# Altium PCB PCB1.PcbDoc
Units mm, origin at the board's own origin, x right, y up, seen from the top; angles counter-clockwise.
Board outline 152.4 x 101.6 mm, 2 copper layers (Top Layer, Bottom Layer); 23 components, 12 nets, 53 pads, 0 vias.
Unrouted connection lines stored in the file: 1.
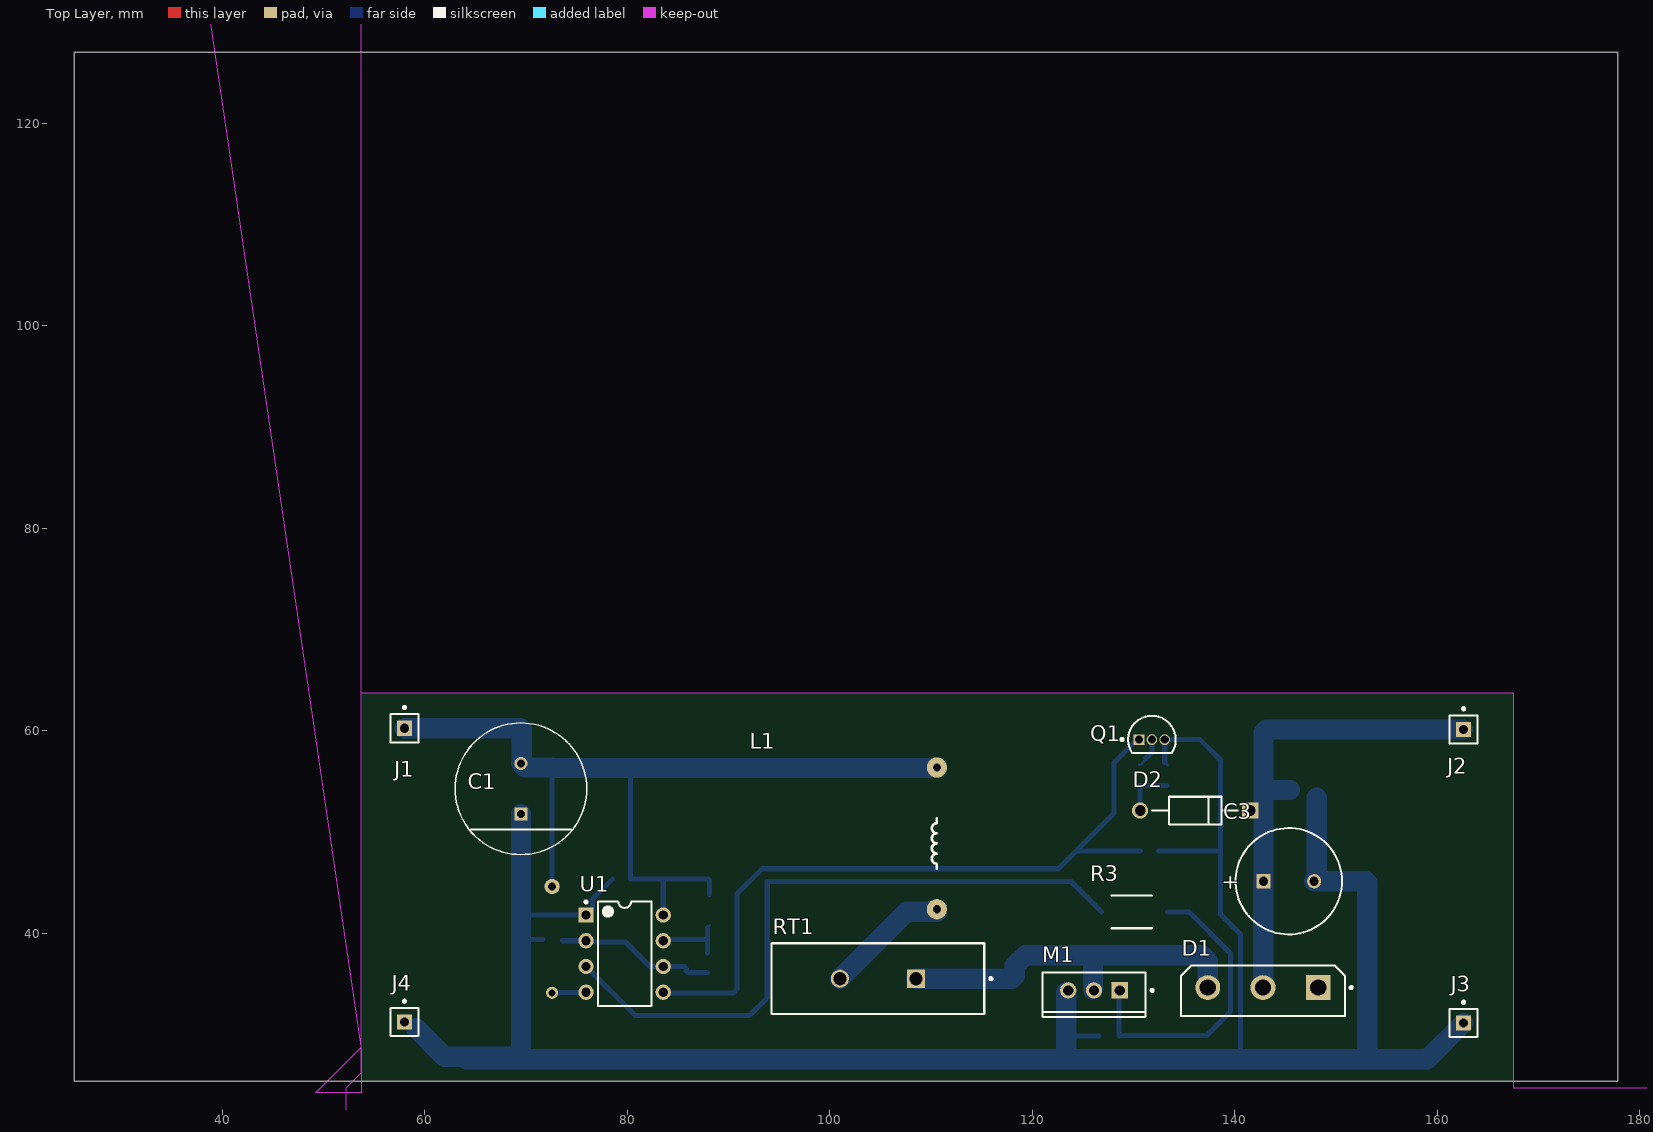
[diagram p0: Top Layer view]
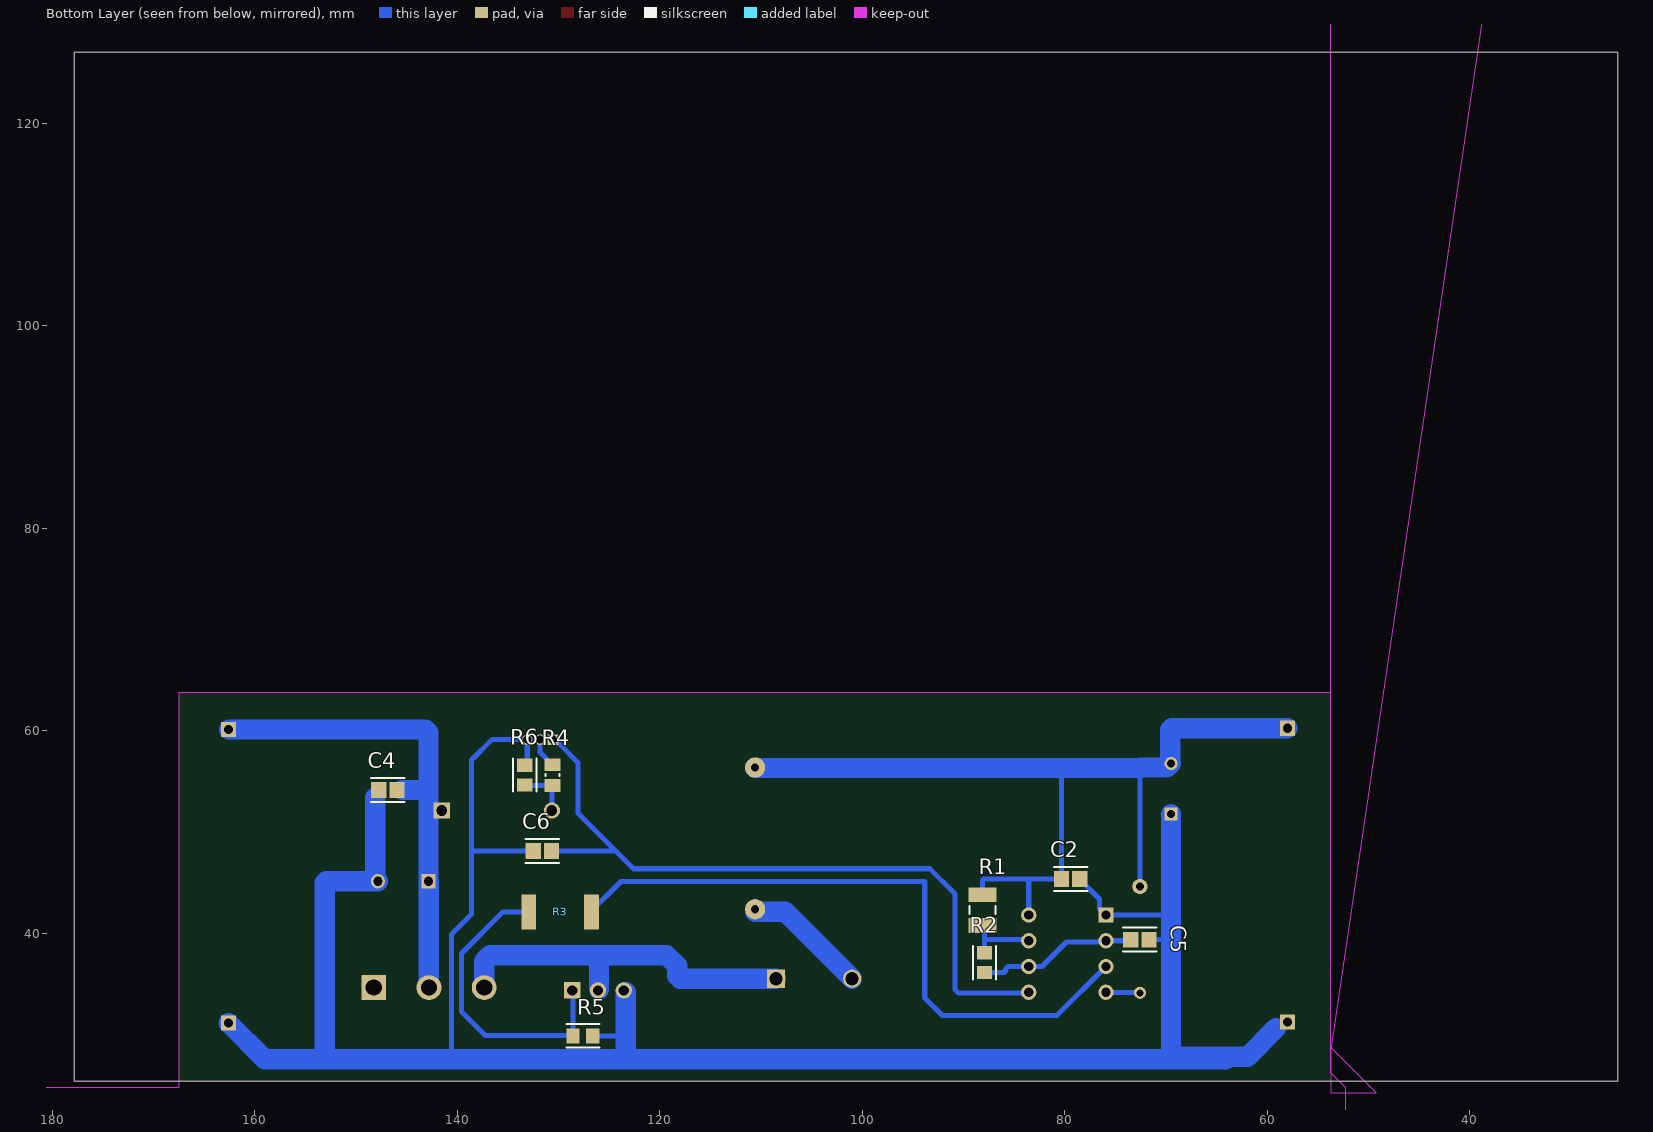
[diagram p1: Bottom Layer view, seen from below]
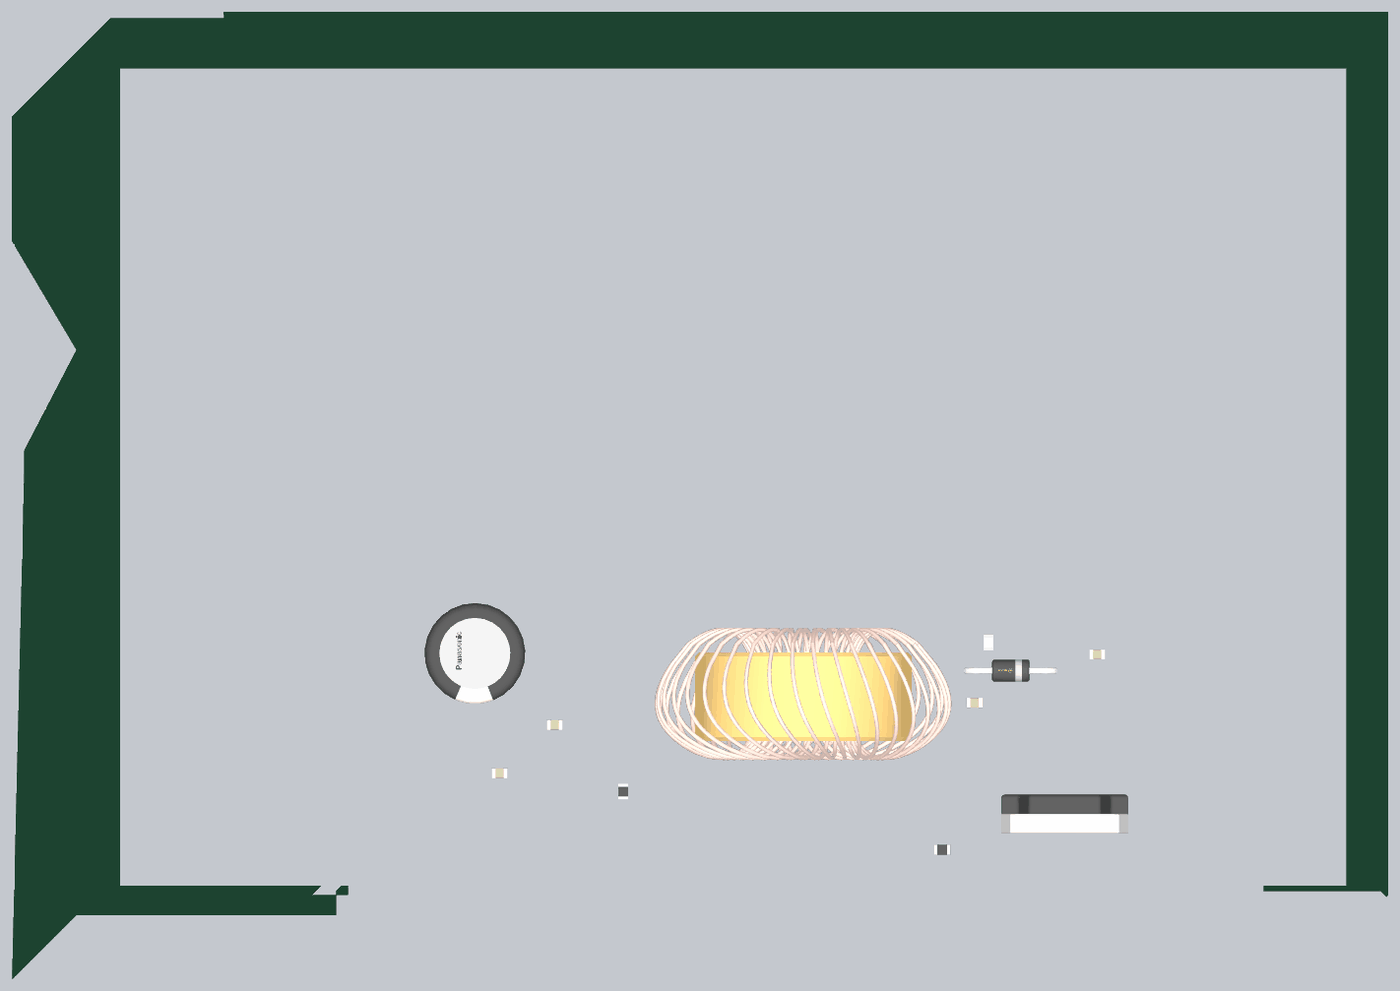
[diagram p2: 3D render of the assembled board from above, using the file's embedded part models]
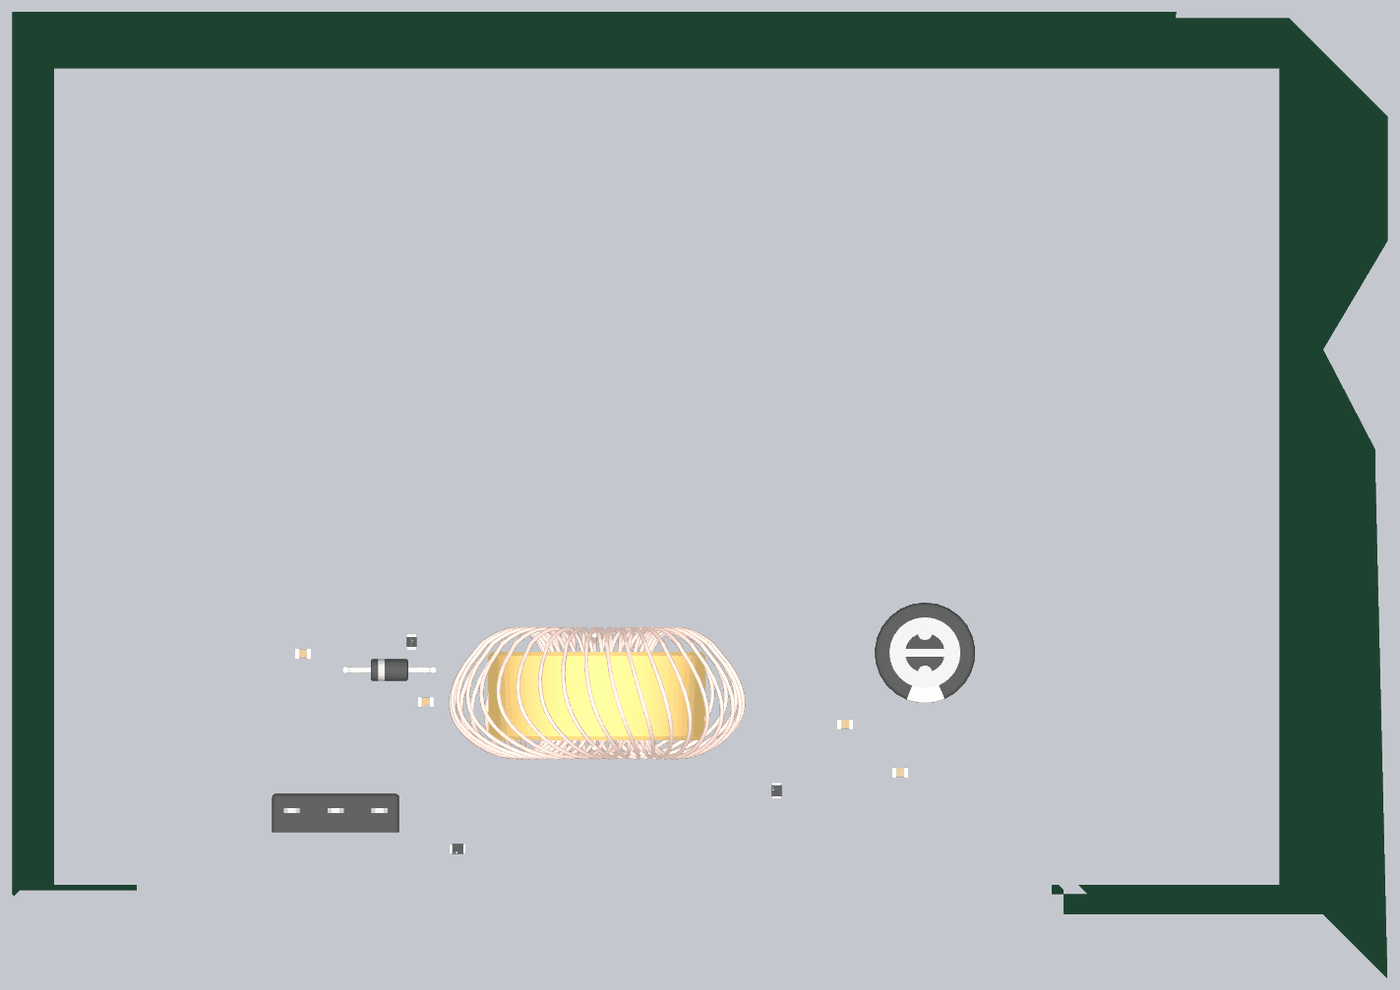
[diagram p3: 3D render of the assembled board from below, using the file's embedded part models]

## Layer stack, top to bottom
Top Solder: solder mask 0.0102, Solder Resist, Dk 3.5
Top Layer: signal copper 0.0356
Dielectric 1: dielectric 0.32, FR-4, Dk 4.8
Bottom Layer: signal copper 0.0356
Bottom Solder: solder mask 0.0102, Solder Resist, Dk 3.5

## Board outline
25.4,25.4 177.8,25.4 177.8,127 25.4,127
cut-out: 53.75,28.5 53.75,24.25 49.25,24.25 53.75,28.75 53.75,63.75 167.5,63.75 167.5,24.75 182,24.75 182.75,24 183,24.25 183,134 38.25,134
cut-out: 12,13.75 20,21.75 52.25,21.75 52.25,24.75 53.75,26.25 53.75,133.25 24.25,133.25 12,121 12,105.5 20,92 13.5,79.5 13.5,76.75

## Design rules (kind name [scope] priority, off if disabled: settings)
Clearance [All] p1: gap=0.254 ignorepadtopadclearanceinfootprint=FALSE except(0: Arc-Hole Track-Hole SMDPad-Hole THPad-Hole Via-Hole Fill-Hole Poly-Hole Region-Hole Text-Hole)
PolygonConnect [All] p1: connectstyle=Relief reliefconductorwidth=0.254 reliefentries=4 polygonreliefangle="90 Angle" airgapwidth=0.254
RoomDefinition Sheet1 [InComponentClass('Sheet1')] p1: confinementstyle=ConfineIn formatcopy=TRUE lockcomponents=FALSE outline 54.075,26.63 166.825,26.63 166.825,62.88 54.075,62.88
RoutingVias [All] p1: holewidth=0.711 width=1.27 viastyle="Through Hole" minholewidth=0.711 minwidth=1.27 maxholewidth=0.711 maxwidth=1.27
SolderMaskExpansion [All] p1: expansion=0.102 istentingtop=FALSE
Width [All] p1: maxlimit=0.254 minlimit=0.254 preferedwidth=0.254
30 further rules are at their usual default settings.

## Classes and differential pairs
component class Sheet1: C1 C4 C5 D1 D2 J1 J2 J3 J4 L1 M1 Q1 R1 R2 R4 R5 R6 R?1 RT1 U1

## Components (designator, comment, footprint, x,y, rotation, side; value= is the part's Value field where it differs from the comment)
C1 "MALREKA00FG447DG0K" FP-ECA-1HM102-MFG 69.5,54.275 r90 top
C2 "C0805C104K3RACAUTO" FP-C0805C-DN-IPC_A 79.424,45.38 r0 bottom value="0.10 μF"
C3 "16ZLQ2200MEFC10X25" PNSC-EEUFM1H221-2 145.325,45.15 r0 top
C4 "C0805C104K3RACAUTO" FP-C0805C-DN-IPC_A 146.825,54.15 r0 bottom value="0.10 μF"
C5 "C0805C102K5RACAUTO" FP-C0805C-DN-IPC_A 72.575,39.38 r180 bottom value="1 pF"
C6 "C0805C104K3RACAUTO" FP-C0805C-DN-IPC_A 131.575,48.13 r0 bottom value="0.10 μF"
D1 "MBR4060PT" FP-340BZ-MFG 142.775,34.325 r270 top
D2 "BZX85C12" FP-017AH-MFG 136.075,52.13 r180 top
J1 "Socket" PIN1 58,60.25 r0 top
J2 "Socket" PIN1 162.575,60.13 r0 top
J3 "Socket" PIN1 162.575,31.15 r0 top
J4 "Socket" PIN1 58,31.25 r0 top
L1 "Inductor" Inductor 110.575,48.88 r90 top value=200uH
M1 "IRFZ44N" INF-PG-TO220-3-1 126.085,34.375 r270 top
Q1 "BC547B" ONSC-TO-92-3-29-11 131.805,59.13 r0 top
R1 "ERJ-P14J362U" RESC3225X70X50ML20T20 88.125,42.3 r90 bottom
R2 "RN73C2A10KBTG" FP-RN732A-IPC_A 87.925,37.1 r90 bottom value=10KΩ
R3 "51R 1% 2512(6432)" RESC2512(6432)_M 129.825,42.13 r0 top value="51.00 Ohm"
R4 "RK73H2ATTE1001F" RESC2013X60X30ML20T20 130.575,55.63 r90 bottom
R5 "RN73C2A10KBTG" FP-RN732A-IPC_A 127.575,29.875 r0 bottom value=10KΩ
R6 "CRGP0805F47K" FP-CRGP0805-IPC_A 133.325,55.63 r270 bottom value=47KΩ
RT1 "B57364S209M" TDK-B57364 104.75,35.525 r180 top
U1 "LM555CN" N08E 79.745,38 r0 top

## Footprints (in the part's own frame and the unit in brackets; to place one, negate y for a bottom-side part, rotate by r counter-clockwise, add the part's x,y. Pads: shape width x height; smd on the part's side, far side on the other; paste and mask are expansions set on the pad)
FP-017AH-MFG [mm]
  rect 1.6x1.6 hole 1.05 paste-1000 mask+0: 1(-5.438,0)
  round 1.6 hole 1.05 paste-1000 mask+0: 2(5.438,0)
  silkscreen extent -4.24,-1.36 4.24,1.36, body extent -6.34,-1.46 6.34,1.46, height 0.25
FP-340BZ-MFG [mm]
  rect 2.45x2.45 hole 1.6 paste-1000 mask+0: 1(-0.325,5.45)
  round 2.45 hole 1.6 paste-1000 mask+0: 2(-0.325,0) 3(-0.325,-5.45)
  silkscreen extent -2.5,-8.1 2.5,8.83, body extent -2.6,-8.2 2.6,8.2, height 0.25
FP-C0805C-DN-IPC_A [mm]
  rect 1.505x1.556 smd paste+0 mask+0: 1(-0.901,0) 2(0.901,0)
  silkscreen extent -1.65,-1.18 1.65,1.18, body extent -1,-0.63 1,0.63, height 0.88
FP-CRGP0805-IPC_A [mm]
  rect 1.306x1.51 smd paste+0 mask+0: 1(-0.976,0) 2(0.976,0)
  silkscreen extent -1.63,-1.15 1.63,1.15, body extent -1,-0.63 1,0.63, height 0.65
FP-ECA-1HM102-MFG [mm]
  rect 1.3x1.3 hole 0.8 paste-1000 mask+0: 1(-2.5,0)
  round 1.3 hole 0.8 paste-1000 mask+0: 2(2.5,0)
  silkscreen extent -6.5,-6.5 6.5,6.5, body extent -6.6,-6.6 6.6,6.6, height 0.25
FP-RN732A-IPC_A [mm]
  rect 1.306x1.508 smd paste+0 mask+0: 1(-0.976,0) 2(0.976,0)
  silkscreen extent -1.63,-1.15 1.63,1.15, body extent -1,-0.63 1,0.63, height 0.65
Inductor [mm] "Inductor"
  round 2 hole 0.8: 1(-6.5,0) 2(7.5,0)
  silkscreen extent -2.5,0 2.5,0.5, body extent -7.85,-18.13 8.6,18.73, height 37.43
INF-PG-TO220-3-1 [mm] "FM, 3-Leads, Body 10x4.4mm, Pitch 2.54mm"
  rect 1.6x1.6 hole 1: 1(0,2.54)
  round 1.6 hole 1: 2(0,0) 3(0,-2.54)
  silkscreen extent -1.75,-5.1 2.65,5.88, body extent -1.75,-5.1 2.65,5.1, height 20.7
N08E [mm] "DIP, 8-Pin, Row Spacing 7.62 mm, Pitch 2.54 mm"
  rect 1.5x1.5 hole 0.9: 1(-3.81,3.81)
  round 1.5 hole 0.9: 2(-3.81,1.27) 3(-3.81,-1.27) 4(-3.81,-3.81) 5(3.81,-3.81) 6(3.81,-1.27) 7(3.81,1.27) 8(3.81,3.81)
  silkscreen extent -3.93,-5.15 2.65,5.23, body extent -3.6,-5.15 3.6,5.15, height 5.33
ONSC-TO-92-3-29-11 [mm] "TO, 3-Leads, Body Dia 4.7mm, Pitch 1.27mm"
  rect 1.05x1.05 hole 0.8: 1(-1.27,0)
  round 1.05 hole 0.8: 2(0,0) 3(1.27,0)
  silkscreen extent -3.07,-1.34 2.35,2.35, body extent -2.35,-1.33 2.36,2.36, height 7.87
PIN1 [mm] "Connector; Plug"
  rect 1.5x1.5 hole 0.9: 1(0,0)
  silkscreen extent -1.4,-1.4 1.4,2.17
PNSC-EEUFM1H221-2 [mm] "THD, 2-Leads, Dia 10.5mm, Body Length 17.5mm, Pin Spacing 5mm"
  rect 1.4x1.4 hole 0.9: 1(-2.5,0)
  round 1.4 hole 0.9: 2(2.5,0)
  silkscreen extent -5.25,-5.25 5.25,5.25, body extent -5.25,-5.25 5.25,5.25, height 17.5
RESC2013X60X30ML20T20 [mm] "Chip Resistor, 2-Leads, Body 2.00x1.25mm, IPC Low Density"
  rect 1.25x1.55 smd: 1(-1.025,0) 2(1.025,0)
  silkscreen extent -0.1,-0.67 0.1,0.67, body extent -1.1,-0.72 1.1,0.72, height 0.6
RESC2512(6432)_M [mm] "Chip Resistor, Body 6.4x3.2mm, IPC Low Density"
  rect 1.45x3.45 smd far side: 1(-3.1,0) 2(3.1,0)
  silkscreen extent -2,-1.63 2,1.63, body extent -3.25,-1.7 3.25,1.7, height 0.75
RESC3225X70X50ML20T20 [mm] "Chip Resistor, 2-Leads, Body 3.20x2.50mm, IPC Low Density"
  rect 1.45x2.8 smd: 1(-1.525,0) 2(1.525,0)
  silkscreen extent -0.4,-1.3 0.4,1.3, body extent -1.7,-1.35 1.7,1.35, height 0.7
TDK-B57364 [mm] "THD, 2-Leads, Body 21x7mm"
  rect 1.8x1.8 hole 1.3: 1(-3.75,0)
  round 1.8 hole 1.3: 2(3.75,0)
  silkscreen extent -11.28,-3.5 10.5,3.5, body extent -10.5,-3.5 10.5,3.5, height 28

## Part data
C1: "Cap Alum 4700UF 20% 16V Radial", Capacitance=4.7mF, Case/Package=Radial, ESR (Equivalent Series Resistance)=80mR, Manufacturer="Vishay Roederstein", Max Operating Temperature=85°C, Min Operating Temperature=-40°C, Package Quantity=400, Ripple Current=2.129A, Tolerance=20%, Voltage Rating=16V, Category="Aluminum Electrolytic Capacitors", ComponentLink1Description=http://www.vishay.com/docs/25001/alucapsintroduction.pdf?src-supplier=Digi-Key, ComponentLink1URL=http://www.vishay.com/docs/25001/alucapsintroduction.pdf?src-supplier=Digi-Key, Height - Seated (Max)=1.063inch, Lead Pitch=0.197inch, Life (Hours)=2000Hour, Manufacturer Part Number=MALREKA00FG447DG0K, Mount="Through Hole", Packaging=Bulk, Polarity=Polar, Pricing 1="2000=0,67103, 2800=0,65462, 4800=0,64540, 10000=0,62696, 20000=0,61313, 100000=0,59930, 200000=0,58547 (USD)", RoHS=Yes, RoHS Compliant=Yes, Supplier 1=Avnet, Supplier Part Number 1=MALREKA00FG447DG0K
C2 C4 C6: library part CMP-2007-01164-2, "CAP CER 0.1UF 25V X7R 0805", Capacitance="0.10 μF", Manufacturer=KEMET, Package=C0805C-DN, Temperature="-55°C to +125°C", Temperature Characteristic=X7R, Temperature Coefficient=30ppm/°C, Temperature Range High=+125°C, Temperature Range Low=-55°C, Tolerance=0.1, Voltage Rating="25 V", Automotive=No, Category=Cap, ComponentLink2Description=Datasheet, ComponentLink2URL=https://content.kemet.com/datasheets/KEM_C1003_C0G_SMD.pdf, Device Class L1="Passive Components", Device Class L2=Capacitors, Device Class L3="Ceramic Capacitors", Digikey Description="CAP CER 0.1UF 25V X7R 0805", Height=0.88mm, Ipc Land Pattern Name=CAPC200125X78, Lead Free=Yes, Manufacturer Part Number=C0805C104K3RACAUTO, Material=Ceramic, Mouser Description="Smd Multilayer Ceramic Capacitor, Aec-Q200 C Series, 0.1 F, 10%, X7r, 25 V, 0805 [2012 Metric]", Octopart=https://octopart.com/c0805c104k3racauto-kemet-12542886, RoHS=TRUE
C3: "Cap Aluminum Lytic 2200uF 16V 20% (10 X 25mm) Radial 5mm 2500mA 5000h 105C", Capacitance=2.2mF, Case/Package=Radial, Manufacturer=Rubycon, Max Operating Temperature=105°C, Min Operating Temperature=-40°C, Ripple Current=1.75A, Tolerance=20%, Voltage Rating=16V, Category="Aluminum Electrolytic Capacitors", ComponentLink1Description=http://www.rubycon.co.jp/en/catalog/e_pdfs/aluminum/e_ZLQ.pdf?src-supplier=Digi-Key, ComponentLink1URL=http://www.rubycon.co.jp/en/catalog/e_pdfs/aluminum/e_ZLQ.pdf?src-supplier=Digi-Key, Height - Seated (Max)=1.063inch, Impedance=15mR, Lead Pitch=0.197inch, Life (Hours)=5000Hour, Manufacturer Part Number=16ZLQ2200MEFC10X25, Mount="Through Hole", Packaging=Bulk, Polarity=Polar, Pricing 1="1=0,98000, 10=0,72100, 50=0,57700, 100=0,49460, 500=0,39156, 1000=0,32973, 2500=0,30912, 5000=0,28851 (USD)", RoHS=Yes, Stock 1=488, Supplier 1=Digi-Key
C5: library part CMP-2007-00243-2, "1 pF ±0.25pF 200V Ceramic Capacitor C0G, NP0 0805R 0805", Capacitance=1pF, Manufacturer=KEMET, Package=C0805C-DN, Temperature="-55°C to +125°C", Temperature Characteristic=X7R, Temperature Coefficient=30ppm/°C, Temperature Range High=+125°C, Temperature Range Low=-55°C, Tolerance=0.1, Voltage Rating="200 V", Automotive=No, Category=Cap, ComponentLink2Description=Datasheet, ComponentLink2URL=https://content.kemet.com/datasheets/KEM_C1003_C0G_SMD.pdf, Device Class L1="Passive Components", Device Class L2=Capacitors, Device Class L3="Ceramic Capacitors", Digikey Description="1 pF ±0.25pF 200V Ceramic Capacitor C0G, NP0 0805 (2012 Metric)", Height=0.88mm, Ipc Land Pattern Name=CAPC200125X78, Lead Free=Yes, Manufacturer Part Number=C0805C102K5RACAUTO, Material=Ceramic, Mouser Description="Cap Ceramic 0.001uF 50V X7R 10% Pad SMD 0805 125C Automotive T/R", Octopart=https://octopart.com/c0805c102k5racauto-kemet-12563740, RoHS=TRUE
D1: "Schottky Diodes & Rectifiers 43 amp Rectifiers Schottky Barrier", Average Rectified Current=40A, Case/Package=TO-247, Forward Voltage=720mV, Manufacturer="ON Semiconductor / Fairchild", Max Forward Surge Current (Ifsm)=400A, Max Operating Temperature=150°C, Max Repetitive Reverse Voltage (Vrrm)=60V, Max Reverse Current=100mA, Max Reverse Leakage Current=1mA, Min Operating Temperature=-65°C, Package Quantity=30, Category="Schottky Diodes", ComponentLink1Description=https://datasheet.ciiva.com/4714/mbr4060pt-195686-4714526.pdf?src-supplier=Mouser, ComponentLink1URL=https://datasheet.ciiva.com/4714/mbr4060pt-195686-4714526.pdf?src-supplier=Mouser, ComponentLink2Description=https://datasheet.ciiva.com/17322/mbr4060pt-17322588.pdf?src-supplier=Future+Electronics, ComponentLink2URL=https://datasheet.ciiva.com/17322/mbr4060pt-17322588.pdf?src-supplier=Future+Electronics, ComponentLink3Description=https://datasheet.ciiva.com/8300/mbr4060pt-8300748.pdf?src-supplier=Avnet, ComponentLink3URL=https://datasheet.ciiva.com/8300/mbr4060pt-8300748.pdf?src-supplier=Avnet, Current Rating=40A, Element Configuration="Common Cathode", Forward Current=40A, Height=21.3mm, Lead Free="Lead Free", Length=16.4mm, Manufacturer Part Number=MBR4060PT, Max Reverse Voltage (DC)=60V, Max Surge Current=400A, Mount="Through Hole", Number of Pins=3, Packaging=Rail/Tube, Peak Non-Repetitive Surge Current=400A, Pricing 1="1=2,70350, 10=1,95840, 100=1,82790, 250=1,49630, 500=1,48140, 1000=1,41390 (USD)", Radiation Hardening=No, RoHS=Yes, RoHS Compliant=Yes, Stock 1=226, Supplier 1="Arrow Electronics", Supplier Part Number 1=MBR4060PT, Voltage Rating (DC)=60V, Weight=5.508g, Width=5.22mm
D2: library part CMP-07164-000008-1, "DIODE ZENER 12V 1W DO41", Forward Current=200mA, Manufacturer="ON Semiconductor", Max Junction Temp=+200°C, Max Reverse Leakage Current=0.5uA, Max Zener Voltage=12.7V, Nom Zener Voltage=12V, Package=017AH, Power Dissipation=1W, Reverse Voltage=8.4V, Temperature="-65°C to +200°C", Temperature Range Low=-65°C, Automotive=No, Category=Diode, ComponentLink2Description=Datasheet, ComponentLink2URL=https://www.onsemi.com/pub/Collateral/BZX85C3V3-D.PDF, Device Class L1="Discrete Semiconductors", Device Class L2=Diodes, Device Class L3="Zener Diodes", Digikey Description="DIODE ZENER 12V 1W DO41", Footprint Url=https://www.onsemi.com/pub/Collateral/017AH.PDF, Height=2.72mm, Ipc Land Pattern Name=DIOPA1088W105L520D272, Lead Free=Yes, Manufacturer Part Number=BZX85C12, Mouser Description="Zener Diodes 12V 1W Zener", Octopart=https://octopart.com/bzx85c12-on+semiconductor-84409056, RoHS=TRUE, Temperature Range High=+200°C, Zener Impedance=9Ω
M1: "MOSFET, Power; N-Ch; VDSS 55V; RDS(ON) 17.5 Milliohms; ID 49A; TO-220AB; PD 94W; -55deg", Case/Package=TO-220AB, Continuous Drain Current (ID)=49A, Gate to Source Voltage (Vgs)=20V, Manufacturer="International Rectifier", Max Operating Temperature=175°C, Min Operating Temperature=-55°C, Power Dissipation=94W, Supplier Part Number 1=IRFZ44NPBF-ND, Category=MOSFETs, ComponentLink1Description=http://components.arrow.com/part/dataview/0323_01885316?src-supplier=Arrow+Europe, ComponentLink1URL=http://components.arrow.com/part/dataview/0323_01885316?src-supplier=Arrow+Europe, Fall Time=165ns, Manufacturer Part Number=IRFZ44N, Mount="Through Hole", Number of Elements=1, Number of Pins=3, Pricing 1="1=1,25000, 10=1,12000, 25=1,06280, 100=0,87290, 500=0,72108, 1000=0,57752 (USD)", Rise Time=185ns, RoHS=No, Stock 1=16256, Supplier 1=Digi-Key, Turn-Off Delay Time=85ns, Turn-On Delay Time=19ns
Q1: library part CMP-1048-01467-1, "Amplifier Transistor, NPN Silicon, 3-Pin TO-92, Bulk Box", Manufacturer="On Semiconductor", ComponentLink1Description="Manufacturer URL", ComponentLink1URL=http://www.onsemi.com/, ComponentLink2Description=Datasheet, ComponentLink2URL=http://www.onsemi.com/pub_link/Collateral/BC546-D.PDF, ComponentLink3Description="Package Specification", ComponentLink3URL=http://www.onsemi.cn/pub_link/Collateral/2N6426-D.PDF, DatasheetVersion="Rev. 7", fT Min (MHz)=150, IC Continuous (A)=0.1, Mounting Technology="Through Hole", PackageDescription="3-Pin Transistor Outline, Body 4.825 x 3.685 mm, Pitch 1.27 mm", PackageReference=TO-92-3-29-11_AM_SL, PackageVersion="Rev. AM", Packing="Bulk Box", PartNumber=BC547B, Polarity=NPN, RoHS=FALSE
R1: library part CMP-2005-03719-1, Manufacturer=Panasonic, Part Number=ERJ-P14J362U
R2 R5: library part CMP-03211-001029-1, "SMD Chip Resistor, Thin Film, 10KΩ, 100 V, 0805 [2012 Metric], 100 mW, 0.1%, RN73 Series", Manufacturer="TE Connectivity", Package=RN732A, Power Rating=0.1W, Resistance=10KΩ, Temperature="-55°C to 155°C", Temperature Coefficient=10ppm/°C, Temperature Range High=155°C, Temperature Range Low=-55°C, Tolerance=0.1%, Voltage Rating=100V, Automotive=No, Category=Res, ComponentLink2Description=Datasheet, ComponentLink2URL=https://www.te.com/commerce/DocumentDelivery/DDEController?Action=showdoc&DocId=Data+Sheet%7F1773270%7FP%7Fpdf%7FEnglish%7FENG_DS_1773270_P.pdf%7F1676162-2, Composition="Thin Film", Device Class L1="Passive Components", Device Class L2=Resistors, Device Class L3="Chip SMD Resistors", Height=0.65mm, Ipc Land Pattern Name=RESC200125X55, Lead Free=Yes, Manufacturer Part Number=RN73C2A10KBTG, Octopart=https://octopart.com/rn73c2a10kbtg-te+connectivity-21411919, octopart_url=https://octopart.com/rn73c2a10kbtg-te+connectivity-21411919, Packaging="250 cut tape length", RoHS=TRUE, Series=RN73
R3: library part CMP-1018-00364-1, "51R 1W 1% 2512 (6432 Metric)  SMD", Case-EIA=2512, Case-Metric=6432, Power="1 W", Tolerance="1 %", Technology=SMT
R4: library part CMP-2001-01881-1, Manufacturer="KOA Speer", Part Number=RK73H2ATTE1001F
R6: library part CMP-03211-006358-1, "CRGP0805 47KΩ 0.33W ±100ppm/°C 1% 150V", Ambient Temperature Range High=+70°C, Manufacturer=TE, Package=CRGP0805, Power Rating=0.33W, Resistance=47KΩ, Temperature="-55°C to +155°C", Temperature Coefficient=±100ppm/°C, Temperature Range High=+155°C, Temperature Range Low=-55°C, Tolerance=0.01, Voltage Rating=150V, Automotive=No, Category=Res, ComponentLink2Description=Datasheet, ComponentLink2URL=https://www.mouser.com/datasheet/2/418/NG_DS_9-1773463-9_A-1358566.pdf, Composition="Thick Film", Device Class L1="Passive Components", Device Class L2=Resistors, Device Class L3="Chip SMD Resistors", Height=0.65mm, Ipc Land Pattern Name=RESC200125X55, Lead Free=Yes, Manufacturer Part Number=CRGP0805F47K, Octopart=https://octopart.com/crgp0805f47k-te+connectivity-91018823, RoHS=TRUE, Series=CRGP
RT1: library part CMP-2000-05907-1, "Inrush Current Limiter, 2 Ohm, -55 to 170 degC, 2-Pin THD, RoHS, Bulk", Manufacturer=TDK, Package Description="2-Pin Through Hole Device, Body 21 x 7 mm", Package Reference=B57364, Datasheet URL=https://en.tdk.eu/inf/50/db/icl_16/S364.pdf, Datasheet Version=11/2015, Manufacturer URL=http://www.tdk.com/, Mounting Technology=ThroughHole
U1: library part CMP-0056-00017-2, "Timer, 8-pin MDIP", Manufacturer="National Semiconductor", PackageTopMarking=NSUZXYTTE#*LM*555CN, PowerWise=N, Code_JEDEC=MS-001-BA, ComponentLink1Description="LM555 Datasheet", ComponentLink1URL=http://www.national.com/ds/LM/LM555.pdf, ComponentLink2Description="LM555 Web Page", ComponentLink2URL=http://www.national.com/pf/LM/LM555.html, ComponentLink3Description="N08E Package Page", ComponentLink3URL=http://www.national.com/packaging/folders/n08e.html, CompType="Analog IC", DatasheetVersion=Jul-2006, PackageDescription="MDIP, .365 x .250 x .130in, 8 Lead, .100in Pitch", PackageReference=N08E, PackageVersion="revG, May-2006", PinCount=8, RevisionNote="Component URLs added", RoHS=N
J1 J2 J3 J4: LatestRevisionDate=17-Jul-2002, LatestRevisionNote="Re-released for DXP Platform.", Publisher="Altium Limited"

## Free pads (board coordinates)
  round 1.2 hole 0.7: 6(72.575,34.13)
  round 1.524 hole 0.762: 7(72.575,44.63)

## Nets (pads, with @x,y where several pads share a name; then routed paths per layer and width w, separated by ;. In a path a pad name is that pad's centre, name@x,y a point inside that pad or via, vN(x,y) a via of type N, cw(c..) or ccw(c..) an arc to the next point about the centre after c; other vN are vias at no path point)
GND: C1.1 C2.1 C3.2 C4.2 C5.2 C6.2 J3.1 J4.1 M1.3 Q1.3 R5.1 R6.1 U1.1 | length 236.9
  Bottom Layer w0.254: J4.1 J4.1@58.623,30.627 ; 69.5,27.9 69.575,27.825 ; 69.5,41.63 69.68,41.81 ; U1.1 U1.1@76.558,42.433 ; C2.1@78.523,45.354 C2.1 ; 123.35,29.85 123.375,29.875 ; M1.3@123.35,34.18 M1.3 ; R6.1@133.075,56.856 R6.1
  Bottom Layer w0.5: J4.1@58.623,30.627 59.148,30.627 ; 69.5,39.38 C5.2 ; 69.68,41.81 U1.1 ; U1.1@76.558,42.433 76.558,43.389 C2.1@78.523,45.354 ; 123.375,29.875 R5.1 ; C6.2 138.575,48.13 ; R6.1@133.075,56.856 Q1.3 136.575,59.13 138.575,57.13 138.575,48.13 ; 140.575,27.575 140.575,39.88 138.575,41.88 138.575,48.13 ; 152.926,45.15 153.075,45.001
  Bottom Layer w2: 59.148,30.627 61.95,27.825 69.575,27.825 ; 64.075,27.575 123.35,27.575 ; 69.5,27.9 69.5,39.38 69.5,41.63 C1.1 ; M1.3@123.35,34.18 123.35,29.85 123.35,27.575 ; C4.2@148.075,53.38 148.075,45.4 C3.2 152.926,45.15 ; 153.075,27.65 153.075,45.001 ; J3.1 159,27.575 140.575,27.575 123.35,27.575
NetC3_1: C3.1 C4.1 D1.2 D2.1 J2.1 | length 48.9
  Top Layer w0.254: C3.1@142.8,45.125 C3.1
  Bottom Layer w0.254: D2.1 142.825,52.13
  Bottom Layer w2: D1.2@142.8,34.65 C3.1@142.8,45.125 ; C3.1 142.825,52.13 142.825,54.15 ; C4.1@145.424,54.15 142.825,54.15 ; J2.1@162.492,60.13 143.118,60.13 142.825,59.837 142.825,54.15
NetC5_1: C5.1 R2.1 U1.2 U1.6 | length 15.9
  Bottom Layer w0.254: C5.1 C5.1@73.586,39.27 ; U1.2 U1.2@76.055,39.15 ; R2.1 R2.1@87.931,36.13
  Bottom Layer w0.5: C5.1@73.586,39.27 U1.2 ; U1.2@76.055,39.15 79.825,39.15 82.245,36.73 U1.6 85.597,36.73 85.825,36.501 85.825,36.273 85.974,36.124 R2.1
NetC6_1: C6.1 Q1.1 U1.5 | length 71.9
  Bottom Layer w0.254: U1.5 U1.5@83.615,34.13 ; 129.927,58.732 130.137,58.732 130.199,58.794 Q1.1@130.199,59.004
  Bottom Layer w0.5: U1.5@83.615,34.13 90.532,34.13 90.825,34.423 90.825,43.88 93.325,46.38 122.575,46.38 124.325,48.13 ; 129.927,58.732 128.075,56.88 128.075,51.88 124.325,48.13 ; C6.1 124.325,48.13
NetD1_3: D1.3 M1.2 RT1.1 | length 37.1
  Top Layer w0.254: RT1.1 RT1.1@108.55,35.475 ; M1.2@125.925,34.535 M1.2
  Bottom Layer w0.254: M1.2@126,34.46 M1.2 ; 136.75,37.85 136.758,37.842
  Bottom Layer w0.5: 117.975,35.525 118.275,35.825 ; 126,37.701 126.149,37.85
  Bottom Layer w2: RT1.1 117.975,35.525 ; 118.275,35.825 118.275,36.8 119.325,37.85 126.149,37.85 136.75,37.85 ; M1.2@126,34.46 126,37.701 ; 136.758,37.842 137.325,37.275 D1.3
NetD2_2: D2.2 R4.1 R6.2 | length 5.3
  Bottom Layer w0.254: R4.1 R4.1@130.637,54.543 ; R6.2@133.276,54.605 R6.2
  Bottom Layer w0.5: R4.1 R6.2@133.276,54.605 ; D2.2 R4.1@130.637,54.543
NetL1_1: L1.1 RT1.2 | length 12.3
  Bottom Layer w2: RT1.2 107.605,42.13 L1.1@110.575,42.13
NetM1_1: M1.1 R3.2 R5.2 | length 30.4
  Top Layer w0.254: M1.1@128.55,34.45 M1.1 M1.1@128.576,34.326
  Bottom Layer w0.254: R5.2 R5.2@128.576,29.9 ; M1.1@128.551,34.301 M1.1
  Bottom Layer w0.5: R5.2 M1.1@128.551,34.301 ; R5.2@128.576,29.9 137.206,29.9 139.575,32.269 139.575,38.019 135.464,42.13 R3.2@133.325,42.13
NetQ1_2: Q1.2 R4.2 | length 3.1
  Bottom Layer w0.254: R4.2 130.725,56.655 131.223,57.153 131.223,57.303
  Bottom Layer w0.5: 131.223,57.303 131.805,57.885 Q1.2
NetR1_1: R1.1 R2.2 U1.7 | length 7.3
  Bottom Layer w0.254: U1.7 U1.7@83.685,39.4 ; R1.1@87.925,40.575 R1.1
  Bottom Layer w0.5: U1.7@83.685,39.4 87.776,39.4 87.925,39.251 ; R2.2 87.925,39.251 ; R1.1@87.925,40.575 87.925,39.251
NetR3_1: R3.1 U1.3 | length 66.4
  Bottom Layer w0.5: U1.3 80.785,31.88 90.075,31.88 92.075,31.88 93.825,33.63 93.825,45.13 123.825,45.13 R3.1@126.825,42.13
VCC: C1.2 C2.2 J1.1 L1.2 pad.6 pad.7 R1.2 U1.4 U1.8 | length 95.7
  Bottom Layer w0.254: C1.2 C1.2@69.575,56.85 ; pad.6 pad.6@72.605,34.16 ; U1.4@75.905,34.16 U1.4 ; 80.325,56.327 80.575,56.577 ; 83.526,45.38 83.555,45.351
  Bottom Layer w0.5: 69.426,60.25 69.575,60.101 ; pad.7 72.575,56.577 ; pad.6@72.605,34.16 U1.4@75.905,34.16 ; 80.325,56.327 C2.2 83.526,45.38 87.976,45.38 88.125,45.231 R1.2 ; U1.8 83.555,45.351
  Bottom Layer w2: J1.1 69.426,60.25 ; C1.2 69.895,56.38 72.575,56.38 ; C1.2@69.575,56.85 69.575,60.101 ; 72.575,56.327 80.325,56.327 L1.2@110.575,56.327
pads on no net: D1.1

## Text inside footprints (layer, text, board x,y; h text height)
C3: Top Overlay "+" at 138.721,44.388 h1.5